# Altium PCB PCB_proj_module_1_1.PcbDoc (part 3 of 9)
Units mm, origin at the board's own origin, x right, y up, seen from the top; angles counter-clockwise.
Board outline 413 x 280 mm, 4 copper layers (Top Layer, Signal Layer 1, Signal Layer 2, Bottom Layer), stack 0.778 mm thick; 1054 components, 639 nets, 3181 pads, 673 vias.
Unrouted connection lines stored in the file: 570.
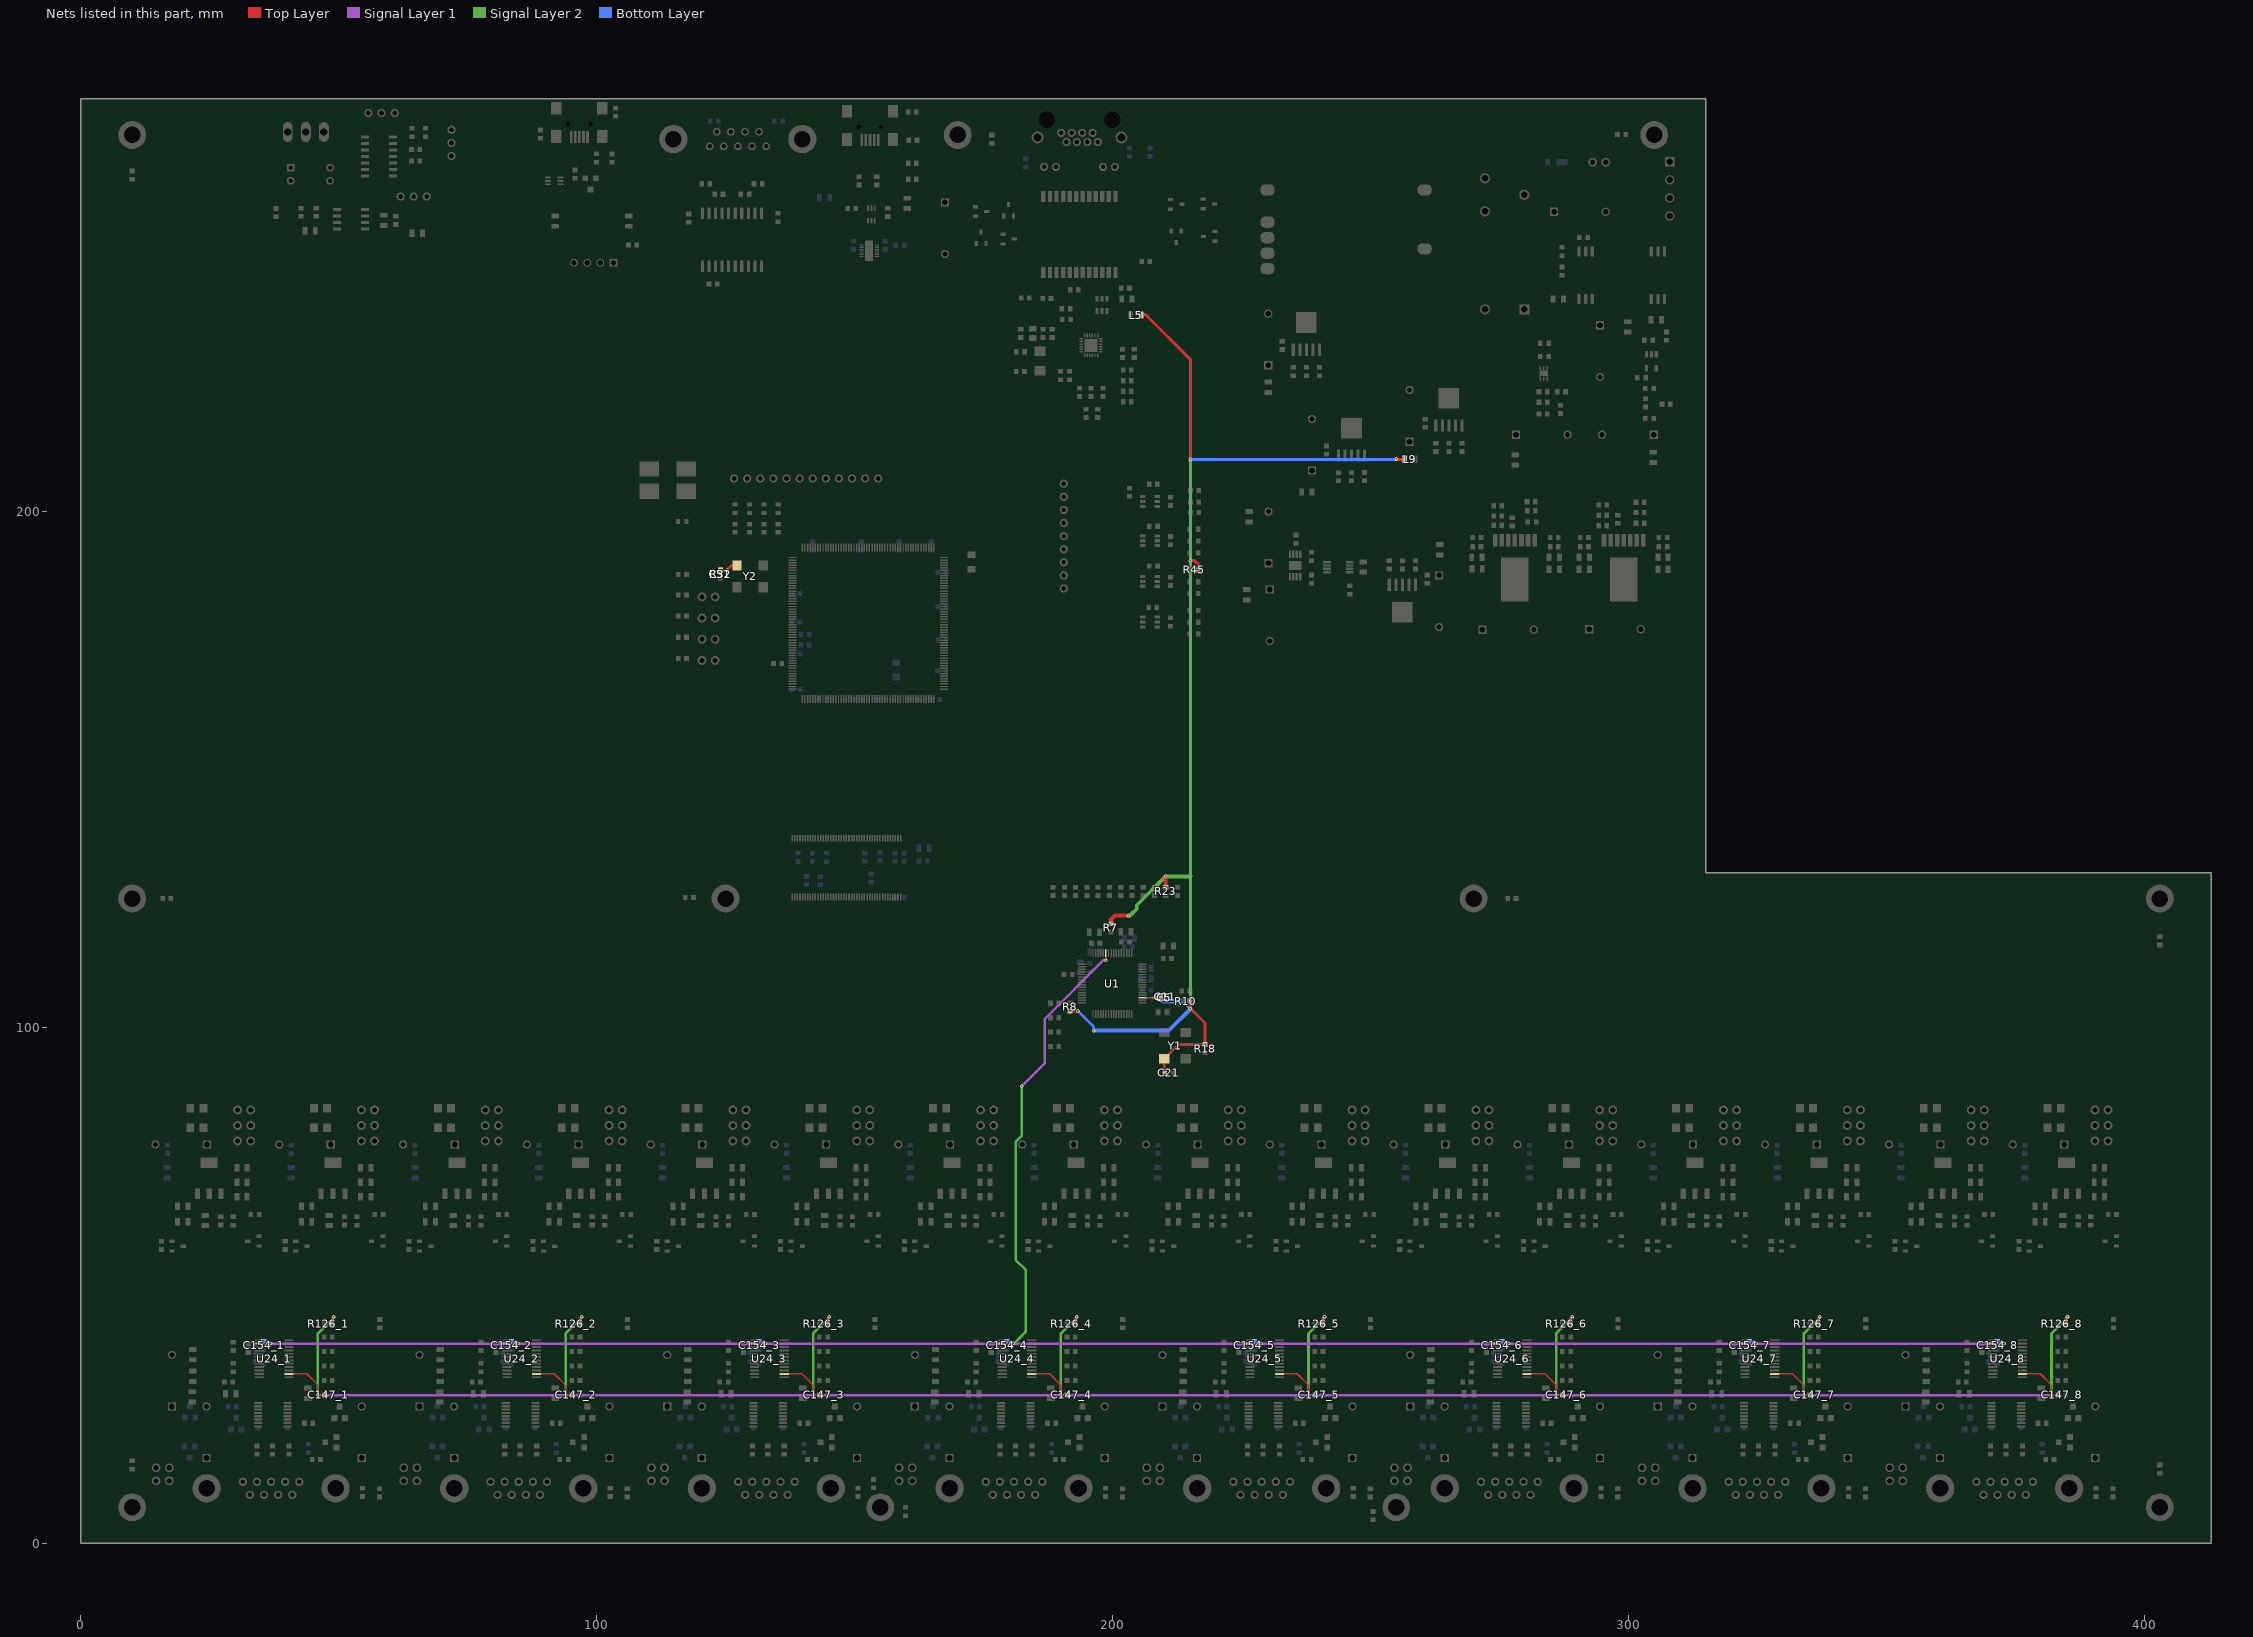
[diagram p5: the nets of this part, all layers, seen from the top]

## Components (designator, comment, footprint, x,y, rotation, side; value= is the part's Value field where it differs from the comment) (continued)
TP13_5 "VHall" TP2 216.4,16.55 r90 top (schematic designator TP13)
TP13_6 "VHall" TP2 264.4,16.55 r90 top (schematic designator TP13)
TP13_7 "VHall" TP2 312.4,16.55 r90 top (schematic designator TP13)
TP13_8 "VHall" TP2 360.4,16.55 r90 top (schematic designator TP13)
TP14_1 "AMPin" TP2 17.7,26.55 r90 top (schematic designator TP14)
TP14_2 "AMPin" TP2 65.7,26.55 r90 top (schematic designator TP14)
TP14_3 "AMPin" TP2 113.7,26.55 r90 top (schematic designator TP14)
TP14_4 "AMPin" TP2 161.7,26.55 r90 top (schematic designator TP14)
TP14_5 "AMPin" TP2 209.7,26.55 r90 top (schematic designator TP14)
TP14_6 "AMPin" TP2 257.7,26.55 r90 top (schematic designator TP14)
TP14_7 "AMPin" TP2 305.7,26.55 r90 top (schematic designator TP14)
TP14_8 "AMPin" TP2 353.7,26.55 r90 top (schematic designator TP14)
TP16 "5V8 source" TP2 271.7,177.1 r0 top value=OSC_TP
TP17 "3V source" TP2 292.4,177.2 r0 top value=OSC_TP
U1 "AD7768BSTZ" ST-64-2_ADI-M 199.978,108.524 r0 top locked
U2 "74HC02D" SOIC127P600X175-14N 57.805,268.824 r0 top
U3 "ADUM5028" SOIC127P600X175-8N 52.4,256.671 r180 top
U4 "STM32F756BGT6" QFP50P3000X3000X160-208N 152.65,178.35 r0 top
U5 "TPS3808ADJ" SOT95P270X145-6N 207.3,201.97 r0 top value=ADJ
U6 "TPS3808ADJ" SOT95P270X145-6N 207.3,194.35 r0 top value=ADJ
U7 "TPS3808ADJ" SOT95P270X145-6N 207.3,186.476 r0 top value=ADJ
U8 "TPS3808ADJ" SOT95P270X145-6N 207.3,178.602 r0 top value=ADJ
U9 "USBLC6-4SC6" SOT23-6L 197.96,240.073 r90 top
U10 "LAN8742A-CZ-TR" QFN24_0R5_4X4 195.869,232.224 r0 top
U11 "Switching Voltage Regulators 3A Pwr ModLMZ12003EXTTZ (TO-PMOD-7)" "NATIONAL_TO-PMOD-7 (TZA07A)" 278.004,189.114 r270 top value="800 mV to 6 V"
U12 "dc-dc 12V-12V DCP021212U" SOIC127P1030X265-28N 298.715,245.805 r90 top value=12V-12V
U13 "Positive LDO Linear stabilizer 5Vin to 3V3DigitalREG104GA-3.3 (SOT223-6)" SOT223_6-127 237.593,234.364 r0 top value=3V3
U14 "Positive LDO Linear stabilizer 5Vin to 3V3DigitalREG104GA-3.3 (SOT223-6)" SOT223_6-127 265.207,219.664 r0 top value=3V3
U15 "Switching Voltage Regulators 3A Pwr ModLMZ12003EXTTZ (TO-PMOD-7)" "NATIONAL_TO-PMOD-7 (TZA07A)" 299.082,189.114 r270 top value="800 mV to 6 V"
U16 "Positive LDO Linear stabilizer 5Vin to 3V3DigitalREG104GA-3.3 (SOT223-6)" SOT223_6-127 246.329,213.86 r0 top value=3V3
U17 "No Description AvailableADP7118ACPZN-R7 (Package)" CP-6-3_ADI-M 283.593,226.801 r90 top
U18 "0.25ppm Noise, Low Drift Precision ReferencesLTC6655LNCHMS8-4.096#TRPBF (MSOP-8 Analog Devices)" SOP65P490X110-8N 243.775,189.225 r180 top
U19 "Negative LDO Linear stabilizerADP7182AUJZ-R7 (Package)" SOT23-5 304.45,229.172 r270 top value=ADJ
U20 "Positive LDO Linear stabilizer 5Vin to 3V3DigitalREG104GA-5 (SOT223-6)" SOT223_6-127 256.196,182.806 r180 top value=3V3
U21 "IS42S32400F-6TL" SOP50P1176X120-86N 148.434,130.978 r270 top
U22_1 "Reference, 5 VLT3092EST (SOT-223)" SOT223 24.93,70.77 r90 top (schematic designator U22)
U22_2 "Reference, 5 VLT3092EST (SOT-223)" SOT223 48.93,70.77 r90 top (schematic designator U22)
U22_3 "Reference, 5 VLT3092EST (SOT-223)" SOT223 72.93,70.77 r90 top (schematic designator U22)
U22_4 "Reference, 5 VLT3092EST (SOT-223)" SOT223 96.93,70.77 r90 top (schematic designator U22)
U22_5 "Reference, 5 VLT3092EST (SOT-223)" SOT223 120.93,70.77 r90 top (schematic designator U22)
U22_6 "Reference, 5 VLT3092EST (SOT-223)" SOT223 144.93,70.77 r90 top (schematic designator U22)
U22_7 "Reference, 5 VLT3092EST (SOT-223)" SOT223 168.93,70.77 r90 top (schematic designator U22)
U22_8 "Reference, 5 VLT3092EST (SOT-223)" SOT223 192.93,70.77 r90 top (schematic designator U22)
U22_9 "Reference, 5 VLT3092EST (SOT-223)" SOT223 216.93,70.77 r90 top (schematic designator U22)
U22_10 "Reference, 5 VLT3092EST (SOT-223)" SOT223 240.93,70.77 r90 top (schematic designator U22)
U22_11 "Reference, 5 VLT3092EST (SOT-223)" SOT223 264.93,70.77 r90 top (schematic designator U22)
U22_12 "Reference, 5 VLT3092EST (SOT-223)" SOT223 288.93,70.77 r90 top (schematic designator U22)
U22_13 "Reference, 5 VLT3092EST (SOT-223)" SOT223 312.93,70.77 r90 top (schematic designator U22)
U22_14 "Reference, 5 VLT3092EST (SOT-223)" SOT223 336.93,70.77 r90 top (schematic designator U22)
U22_15 "Reference, 5 VLT3092EST (SOT-223)" SOT223 360.93,70.77 r90 top (schematic designator U22)
U22_16 "Reference, 5 VLT3092EST (SOT-223)" SOT223 384.93,70.77 r90 top (schematic designator U22)
U23_1 "ADG1609BRUZ" SOP65P640X120-16N 37.27,24.975 r180 top (schematic designator U23)
U23_2 "ADG1609BRUZ" SOP65P640X120-16N 85.27,24.975 r180 top (schematic designator U23)
U23_3 "ADG1609BRUZ" SOP65P640X120-16N 133.27,24.975 r180 top (schematic designator U23)
U23_4 "ADG1609BRUZ" SOP65P640X120-16N 181.27,24.975 r180 top (schematic designator U23)
U23_5 "ADG1609BRUZ" SOP65P640X120-16N 229.27,24.975 r180 top (schematic designator U23)
U23_6 "ADG1609BRUZ" SOP65P640X120-16N 277.27,24.975 r180 top (schematic designator U23)
U23_7 "ADG1609BRUZ" SOP65P640X120-16N 325.27,24.975 r180 top (schematic designator U23)
U23_8 "ADG1609BRUZ" SOP65P640X120-16N 373.27,24.975 r180 top (schematic designator U23)
U24_1 "ADA4254ARUZ" TSSOP-24 37.5,35.8 r0 top (schematic designator U24)
U24_2 "ADA4254ARUZ" TSSOP-24 85.5,35.8 r0 top (schematic designator U24)
U24_3 "ADA4254ARUZ" TSSOP-24 133.5,35.8 r0 top (schematic designator U24)
U24_4 "ADA4254ARUZ" TSSOP-24 181.5,35.8 r0 top (schematic designator U24)
U24_5 "ADA4254ARUZ" TSSOP-24 229.5,35.8 r0 top (schematic designator U24)
U24_6 "ADA4254ARUZ" TSSOP-24 277.5,35.8 r0 top (schematic designator U24)
U24_7 "ADA4254ARUZ" TSSOP-24 325.5,35.8 r0 top (schematic designator U24)
U24_8 "ADA4254ARUZ" TSSOP-24 373.5,35.8 r0 top (schematic designator U24)
U25 "USBUF02W6" SOTT323-6L_STM-M 153.273,257.592 r90 top
U26 "MURATA_MYBSP0122BABFT" "MURATA_MYBSP0122BABFT_0 - DUPLICATE" 246.319,255.914 r0 top
X2 "X53T-C20SSA-25.000MHz" XTAL_2SM_5R0X3R2 185.959,229.202 r90 top
Y1 "CB3LV-6C-8M000000" OSC_CB3LV-6C-8M000000 212.133,96.486 r180 top
Y2 "CB3LV-6C-8M000000" OSC_CB3LV-6C-8M000000 129.775,187.45 r90 top
С1 "100nF SMD0603" 0603C 122.817,275.73 r0 bottom value=100nF

## Footprints (in the part's own frame and the unit in brackets; to place one, negate y for a bottom-side part, rotate by r counter-clockwise, add the part's x,y. Pads: shape width x height; smd on the part's side, far side on the other; paste and mask are expansions set on the pad)
15EDGRC-3.5-3P-PAK [mm]
  oval 3.861x1.93 hole 1.4: 1(3.4,3.5) 2(3.4,0) 3(3.4,-3.5)
  silkscreen extent -4.6,-5.65 4.6,5.65, body extent -4.6,-5.65 4.6,5.65, height 7.24
0603C [mm] "Chip Capacitor, Body 1.6x0.8mm, Height 1.0mm, IPC Medium Density"
  rect 0.9x1 smd: 1(-0.8,0) 2(0.8,0)
  silkscreen extent -1.5,-0.7 1.5,0.7, body extent -0.87,-0.48 0.88,0.47, height 1
0603R [mm]
  rect 0.9x1 smd: 1(-0.8,0) 2(0.8,0)
  silkscreen extent -1.5,-0.8 1.5,0.8, body extent -0.85,-0.47 0.85,0.47, height 0.6
0805C [mm] "Chip Capacitor, Body 2.0x1.25mm, IPC Medium Density"
  rect 1.1x1.45 smd: 1(-0.9,0) 2(0.9,0)
  body extent -1.05,-0.67 1.05,0.68, height 0.9
AMPHENOL_L717DFE09P1ATN [mm] "Right Angled D-Sub 9 Male Contacts with Metal Bracket and Front Female Screwlock (UNC4-40)"
  round 1.6 hole 0.9: 1(5.48,-1.27) 2(2.74,-1.27) 3(0,-1.27) 4(-2.74,-1.27) 5(-5.48,-1.27) 6(4.11,1.27) 7(1.37,1.27) 8(-1.37,1.27) 9(-4.11,1.27)
  round 5.5 hole 3.2: 10(-12.495,0) 11(12.495,0)
  silkscreen extent -15.6,-2.93 15.6,17.67, body extent -15.6,-2.93 15.6,17.67, height 13.45
AMPHENOL_RJHSE-5381 [mm] "1 Port, 8 Positions, CAT5 RJ45 Modular Connector With Yellow And Green LEDs"
  round 1.6 hole 0.9: 1(-3.554,0.886) 2(-2.538,-0.894) 3(-1.522,0.886) 4(-0.506,-0.894) 5(0.51,0.886) 6(1.526,-0.894) 7(2.542,0.886) 8(3.558,-0.894) 9(-6.862,-5.714) 10(-4.572,-5.714) 11(4.568,-5.714) 12(6.858,-5.714)
  round 1 hole 3.2 unplated mask+1.1: M1(-6.352,3.426) M2(6.348,3.426)
  round 2.3 hole 1.6: SHIELD(-8.132,-0.004) SHIELD(8.128,-0.004)
  silkscreen extent -8.26,-7.04 8.25,9.17, body extent -8.42,-7.04 8.41,9.17, height 15.14
COMATEL_385.0358.1.03.400 [mm] "3 Contacts Straight Strip Header Pitch 2.54mm L=6.3mm ''Mini-Wire-Wrap''"
  round 1.6 hole 0.9: 1(0,0) 2(2.54,0) 3(5.08,0)
  silkscreen extent -1.27,-1.23 6.35,1.93, body extent -1.27,-1.22 6.35,1.23, height 8
CP-6-3_ADI-M [mil]
  rect 33x12 smd paste+0 mask+0: 1(-41,25.59) 2(-41,0) 3(-41,-25.59) 4(41,-25.59) 5(41,0) 6(41,25.59)
  rect 39x63 smd paste+0 mask+0: 7(0,0)
  silkscreen extent -89,-46 46,46, body extent -41,-41 42,42, height 24
DFLS [mil]
  rect 83x49 smd paste+0 mask+0: 1(-43.5,0)
  rect 39x49 smd paste+0 mask+0: 2(65.5,0)
  silkscreen extent -114,-43 64,43, body extent -77,-38 77,38, height 32
DFN_12-045 [mm] "0.45mm pitch 12pin"
  rect 0.8x0.25 smd: 1(-1.5,1.15) 2(-1.5,0.7) 3(-1.5,0.25) 4(-1.5,-0.2) 5(-1.5,-0.65) 6(-1.5,-1.1) 7(1.5,-1.1) 8(1.5,-0.65) 9(1.5,-0.2) 10(1.5,0.25) 11(1.5,0.7) 12(1.5,1.15)
  rect 1.6x4 smd: 13(0,0)
  silkscreen extent -2,-2.25 2.05,2.25, body extent -1.5,-1.48 1.5,1.53, height 0.75
DIP4-300 [mm] "DIP 4 Leads, Row Spacing 7.62 mm; Pitch 2.54 mm"
  rect 1.5x1.5 hole 0.9: 1(-3.81,1.27)
  round 1.5 hole 0.9: 2(-3.81,-1.27) 3(3.81,-1.27) 4(3.81,1.27)
  silkscreen extent -2.65,-2.61 2.65,2.61, body extent -3.93,-2.54 3.94,2.54, height 5.33
HDR_1X4_2R54_V_M [mm] "Male Header, Pitch 2.54mm, 4x1 Position, Mated Height 6mm, Tail Length 3mm"
  rect 1.5x1.5 hole 1.02: 1(0,0)
  round 1.5 hole 1.02: 2(2.54,0) 3(5.08,0) 4(7.62,0)
  silkscreen extent -1.27,-1.27 8.89,1.76, body extent -1.27,-1.27 8.89,1.27, height 9
LED0603 [mm]
  rect 0.8x1 smd: 1(-0.825,0) 2(0.825,0)
  silkscreen extent -1.65,-0.7 1.4,0.7, body extent -0.71,-0.47 0.81,0.48, height 0.95
M3 [mm]
  round 5.4 hole 3.2: 1(0,0)
"MURATA_MYBSP0122BABFT_0 - DUPLICATE" [mm]
  rrect91% 2.8x2.2 smd: 1(-16.27,6.42) 2(-16.27,0.18) 3(-16.27,-2.82) 4(-16.27,-5.82) 5(-16.27,-8.82) 6(14.17,-5.01) 7(14.17,6.42)
  silkscreen extent -19.75,-12.65 16.95,10.25, body extent -18.77,-12.34 16.73,10.06, height 11.15
"NATIONAL_TO-PMOD-7 (TZA07A)" [mm] "TO-PMOD 7 Pin Package, NATIONAL Package TZA07A, 1.70mm pitch; 9.85mm L X 10.16mm W X 4.67mm H body"
  rect 2.41x0.89 smd: 1(-5.339,3.81) 2(-5.339,2.54) 3(-5.339,1.27) 4(-5.339,0) 5(-5.339,-1.27) 6(-5.339,-2.54) 7(-5.339,-3.81)
  rect 8.54x5.35 smd: 8(2.291,0)
  silkscreen extent -3.73,-5.08 7.57,5.08, body extent -6.2,-5.08 7.57,5.08, height 4.77
OSC_CB3LV-6C-8M000000 [mm]
  rect 2x1.8 smd: 1(-2.1,2.54) 2(-2.1,-2.54) 3(2.1,-2.54) 4(2.1,2.54)
  silkscreen extent -3.95,-3.5 2.5,3.5, body extent -2.5,-3.5 2.5,3.5, height 1.8
"PB-6X6MM-BLACK - DUPLICATE" [mm] "Surface Mounting Type Tact Switch, 4-Leads, Body 6x6mm, Height 4.5mm Black"
  rect 3.8x3 smd: 1(-3.575,2.15) 2(-3.575,-2.15) 3(3.575,-2.15) 4(3.575,2.15)
  silkscreen extent -5.8,-3.95 5.8,3.95, body extent -3,-3 3,3, height 10.5
QFN24_0R5_4X4 [mm] "SQFN 24 Pins, Pitch 0.5mm, 4mmx4mm"
  rect 0.69x0.28 smd: 1(-1.9,1.25) 2(-1.9,0.75) 3(-1.9,0.25) 4(-1.9,-0.25) 5(-1.9,-0.75) 6(-1.9,-1.25) 13(1.9,-1.25) 14(1.9,-0.75) 15(1.9,-0.25) 16(1.9,0.25) 17(1.9,0.75) 18(1.9,1.25)
  rect 0.28x0.69 smd: 7(-1.25,-1.9) 8(-0.75,-1.9) 9(-0.25,-1.9) 10(0.25,-1.9) 11(0.75,-1.9) 12(1.25,-1.9) 19(1.25,1.9) 20(0.75,1.9) 21(0.25,1.9) 22(-0.25,1.9) 23(-0.75,1.9) 24(-1.25,1.9)
  rect 2.5x2.5 smd: 25(0,0)
  silkscreen extent -2.46,-2.05 2.05,2.05, body extent -2.05,-2.05 2.05,2.05, height 1
QFP50P3000X3000X160-208N [mm]
  rrect25% 1.52x0.28 smd: 1(-14.675,12.75) 2(-14.675,12.25) 3(-14.675,11.75) 4(-14.675,11.25) 5(-14.675,10.75) 6(-14.675,10.25) 7(-14.675,9.75) 8(-14.675,9.25) 9(-14.675,8.75) 10(-14.675,8.25) 11(-14.675,7.75) 12(-14.675,7.25) 13(-14.675,6.75) 14(-14.675,6.25) 15(-14.675,5.75) 16(-14.675,5.25) 17(-14.675,4.75) 18(-14.675,4.25) 19(-14.675,3.75) 20(-14.675,3.25) 21(-14.675,2.75) 22(-14.675,2.25) 23(-14.675,1.75) 24(-14.675,1.25) 25(-14.675,0.75) 26(-14.675,0.25) 27(-14.675,-0.25) 28(-14.675,-0.75) 29(-14.675,-1.25) 30(-14.675,-1.75) 31(-14.675,-2.25) 32(-14.675,-2.75) 33(-14.675,-3.25) 34(-14.675,-3.75) 35(-14.675,-4.25) 36(-14.675,-4.75) 37(-14.675,-5.25) 38(-14.675,-5.75) 39(-14.675,-6.25) 40(-14.675,-6.75) 41(-14.675,-7.25) 42(-14.675,-7.75) 43(-14.675,-8.25) 44(-14.675,-8.75) 45(-14.675,-9.25) 46(-14.675,-9.75) 47(-14.675,-10.25) 48(-14.675,-10.75) 49(-14.675,-11.25) 50(-14.675,-11.75) 51(-14.675,-12.25) 52(-14.675,-12.75) 105(14.675,-12.75) 106(14.675,-12.25) 107(14.675,-11.75) 108(14.675,-11.25) 109(14.675,-10.75) 110(14.675,-10.25) 111(14.675,-9.75) 112(14.675,-9.25) 113(14.675,-8.75) 114(14.675,-8.25) 115(14.675,-7.75) 116(14.675,-7.25) 117(14.675,-6.75) 118(14.675,-6.25) 119(14.675,-5.75) 120(14.675,-5.25) 121(14.675,-4.75) 122(14.675,-4.25) 123(14.675,-3.75) 124(14.675,-3.25) 125(14.675,-2.75) 126(14.675,-2.25) 127(14.675,-1.75) 128(14.675,-1.25) 129(14.675,-0.75) 130(14.675,-0.25) 131(14.675,0.25) 132(14.675,0.75) 133(14.675,1.25) 134(14.675,1.75) 135(14.675,2.25) 136(14.675,2.75) 137(14.675,3.25) 138(14.675,3.75) 139(14.675,4.25) 140(14.675,4.75) 141(14.675,5.25) 142(14.675,5.75) 143(14.675,6.25) 144(14.675,6.75) 145(14.675,7.25) 146(14.675,7.75) 147(14.675,8.25) 148(14.675,8.75) 149(14.675,9.25) 150(14.675,9.75) 151(14.675,10.25) 152(14.675,10.75) 153(14.675,11.25) 154(14.675,11.75) 155(14.675,12.25) 156(14.675,12.75)
  rrect25% 0.28x1.52 smd: 53(-12.75,-14.675) 54(-12.25,-14.675) 55(-11.75,-14.675) 56(-11.25,-14.675) 57(-10.75,-14.675) 58(-10.25,-14.675) 59(-9.75,-14.675) 60(-9.25,-14.675) 61(-8.75,-14.675) 62(-8.25,-14.675) 63(-7.75,-14.675) 64(-7.25,-14.675) 65(-6.75,-14.675) 66(-6.25,-14.675) 67(-5.75,-14.675) 68(-5.25,-14.675) 69(-4.75,-14.675) 70(-4.25,-14.675) 71(-3.75,-14.675) 72(-3.25,-14.675) 73(-2.75,-14.675) 74(-2.25,-14.675) 75(-1.75,-14.675) 76(-1.25,-14.675) 77(-0.75,-14.675) 78(-0.25,-14.675) 79(0.25,-14.675) 80(0.75,-14.675) 81(1.25,-14.675) 82(1.75,-14.675) 83(2.25,-14.675) 84(2.75,-14.675) 85(3.25,-14.675) 86(3.75,-14.675) 87(4.25,-14.675) 88(4.75,-14.675) 89(5.25,-14.675) 90(5.75,-14.675) 91(6.25,-14.675) 92(6.75,-14.675) 93(7.25,-14.675) 94(7.75,-14.675) 95(8.25,-14.675) 96(8.75,-14.675) 97(9.25,-14.675) 98(9.75,-14.675) 99(10.25,-14.675) 100(10.75,-14.675) 101(11.25,-14.675) 102(11.75,-14.675) 103(12.25,-14.675) 104(12.75,-14.675) 157(12.75,14.675) 158(12.25,14.675) 159(11.75,14.675) 160(11.25,14.675) 161(10.75,14.675) 162(10.25,14.675) 163(9.75,14.675) 164(9.25,14.675) 165(8.75,14.675) 166(8.25,14.675) 167(7.75,14.675) 168(7.25,14.675) 169(6.75,14.675) 170(6.25,14.675) 171(5.75,14.675) 172(5.25,14.675) 173(4.75,14.675) 174(4.25,14.675) 175(3.75,14.675) 176(3.25,14.675) 177(2.75,14.675) 178(2.25,14.675) 179(1.75,14.675) 180(1.25,14.675) 181(0.75,14.675) 182(0.25,14.675) 183(-0.25,14.675) 184(-0.75,14.675) 185(-1.25,14.675) 186(-1.75,14.675) 187(-2.25,14.675) 188(-2.75,14.675) 189(-3.25,14.675) 190(-3.75,14.675) 191(-4.25,14.675) 192(-4.75,14.675) 193(-5.25,14.675) 194(-5.75,14.675) 195(-6.25,14.675) 196(-6.75,14.675) 197(-7.25,14.675) 198(-7.75,14.675) 199(-8.25,14.675) 200(-8.75,14.675) 201(-9.25,14.675) 202(-9.75,14.675) 203(-10.25,14.675) 204(-10.75,14.675) 205(-11.25,14.675) 206(-11.75,14.675) 207(-12.25,14.675) 208(-12.75,14.675)
  silkscreen extent -16.49,-14 14,14, body extent -15,-15 15,15, height 1.6
RC1206_0805 [mil]
  rect 60x63 smd paste+0 mask+0: 1(-50,0) 2(50,0)
  silkscreen extent -87,-39 87,39, body extent -63,-31 63,32, height 28
RELAY_G6RN-1_12DC [mm]
  rect 1.95x1.95 hole 1.3: 1(0,0)
  round 1.95 hole 1.3: 2(22.2,0) 3(25.4,7.62) 4(19,7.62) 5(0,7.62)
  silkscreen extent -1.6,-2.1 26.9,8.81, body extent -1.6,-1.19 26.9,8.81, height 15
RESC2012X50N [mm] "Chip Resistor, EIA 0805, Metric 2012, Body 2.0x1.25mm, IPC Medium Density"
  rect 0.95x1.45 smd: 1(-1,0) 2(1,0)
  silkscreen extent -1.8,-1 1.8,1, body extent -1.1,-0.67 1.1,0.68, height 0.5
SAMTEC_TSW-102-23-L-S [mm] "2 Contacts - Pitch 2.54mm - Single Row  Through Mount Straigh Header (Post Lead 5.84mm, Tail Lead 2.92mm, Insulator 2.54mm)"
  round 1.7 hole 1: 1(0,0) 2(2.54,0)
  silkscreen extent -2.15,-1.27 3.81,1.27, body extent -1.27,-1.27 3.81,1.27, height 8.38
SOIC127P600X175-8N [mm] "SOIC 8, Pitch 1.27mm - Body 4x5mm, IPC Medium Density"
  rect 1.55x0.6 smd: 1(-2.7,1.905) 2(-2.7,0.635) 3(-2.7,-0.635) 4(-2.7,-1.905) 5(2.7,-1.905) 6(2.7,-0.635) 7(2.7,0.635) 8(2.7,1.905)
  silkscreen extent -2.53,-2.5 1.55,2.88, body extent -3.1,-2.5 3.1,2.5, height 1.75
SOIC127P600X175-14N [mm] "SOIC 14, Pitch 1.27mm - Body 4x8.75mm, IPC Medium Density"
  rect 1.55x0.6 smd: 1(-2.7,3.81) 2(-2.7,2.54) 3(-2.7,1.27) 4(-2.7,0) 5(-2.7,-1.27) 6(-2.7,-2.54) 7(-2.7,-3.81) 8(2.7,-3.81) 9(2.7,-2.54) 10(2.7,-1.27) 11(2.7,0) 12(2.7,1.27) 13(2.7,2.54) 14(2.7,3.81)
  silkscreen extent -2.52,-4.4 1.55,4.78, body extent -3.1,-4.37 3.1,4.38, height 1.75
SOIC127P1030X265-28N [mm]
  rrect25% 1.9x0.6 smd: 1(-4.605,8.255) 2(-4.605,6.985) 3(-4.605,5.715) 12(-4.605,-5.715) 13(-4.605,-6.985) 14(-4.605,-8.255) 15(4.605,-8.255) 16(4.605,-6.985) 17(4.605,-5.715) 26(4.605,5.715) 27(4.605,6.985) 28(4.605,8.255)
  silkscreen extent -6.6,-8.95 3.75,8.95, body extent -5.17,-8.95 5.17,8.95, height 2.65
SOIC127P1032X265-20N [mm] "SOIC, 1.27mm pitch; 20 pin, 7.50mm W X 12.80mm L X 2.65mm H body, IPC Medium Density"
  rect 2.2x0.6 smd: 1(-5.15,5.715) 2(-5.15,4.445) 3(-5.15,3.175) 4(-5.15,1.905) 5(-5.15,0.635) 6(-5.15,-0.635) 7(-5.15,-1.905) 8(-5.15,-3.175) 9(-5.15,-4.445) 10(-5.15,-5.715) 11(5.15,-5.715) 12(5.15,-4.445) 13(5.15,-3.175) 14(5.15,-1.905) 15(5.15,-0.635) 16(5.15,0.635) 17(5.15,1.905) 18(5.15,3.175) 19(5.15,4.445) 20(5.15,5.715)
  silkscreen extent -5.52,-6.4 3.32,6.67, body extent -5.18,-6.5 5.18,6.5, height 1.68
SOIC127P1600X551-24N [mm]
  rect 2.15x0.85 smd: 1(-7.4,6.985) 2(-7.4,5.715) 3(-7.4,4.445) 4(-7.4,3.175) 5(-7.4,1.905) 6(-7.4,0.635) 7(-7.4,-0.635) 8(-7.4,-1.905) 9(-7.4,-3.175) 10(-7.4,-4.445) 11(-7.4,-5.715) 12(-7.4,-6.985) 13(7.4,-6.985) 14(7.4,-5.715) 15(7.4,-4.445) 16(7.4,-3.175) 17(7.4,-1.905) 18(7.4,-0.635) 19(7.4,0.635) 20(7.4,1.905) 21(7.4,3.175) 22(7.4,4.445) 23(7.4,5.715) 24(7.4,6.985)
  silkscreen extent -8.47,-8.76 5.97,8.76, body extent -8,-8.76 8,8.76, height 5.71
SOP50P1176X120-86N [mm] "SOP, 0.50mm, pitch; 86 pin, 10.16mm W X 22.22mm L X 1.20mm H body, IPC Medium Density"
  rect 1.3x0.3 smd: 1(-5.7,10.5) 2(-5.7,10) 3(-5.7,9.5) 4(-5.7,9) 5(-5.7,8.5) 6(-5.7,8) 7(-5.7,7.5) 8(-5.7,7) 9(-5.7,6.5) 10(-5.7,6) 11(-5.7,5.5) 12(-5.7,5) 13(-5.7,4.5) 14(-5.7,4) 15(-5.7,3.5) 16(-5.7,3) 17(-5.7,2.5) 18(-5.7,2) 19(-5.7,1.5) 20(-5.7,1) 21(-5.7,0.5) 22(-5.7,0) 23(-5.7,-0.5) 24(-5.7,-1) 25(-5.7,-1.5) 26(-5.7,-2) 27(-5.7,-2.5) 28(-5.7,-3) 29(-5.7,-3.5) 30(-5.7,-4) 31(-5.7,-4.5) 32(-5.7,-5) 33(-5.7,-5.5) 34(-5.7,-6) 35(-5.7,-6.5) 36(-5.7,-7) 37(-5.7,-7.5) 38(-5.7,-8) 39(-5.7,-8.5) 40(-5.7,-9) 41(-5.7,-9.5) 42(-5.7,-10) 43(-5.7,-10.5) 44(5.7,-10.5) 45(5.7,-10) 46(5.7,-9.5) 47(5.7,-9) 48(5.7,-8.5) 49(5.7,-8) 50(5.7,-7.5) 51(5.7,-7) 52(5.7,-6.5) 53(5.7,-6) 54(5.7,-5.5) 55(5.7,-5) 56(5.7,-4.5) 57(5.7,-4) 58(5.7,-3.5) 59(5.7,-3) 60(5.7,-2.5) 61(5.7,-2) 62(5.7,-1.5) 63(5.7,-1) 64(5.7,-0.5) 65(5.7,0) 66(5.7,0.5) 67(5.7,1) 68(5.7,1.5) 69(5.7,2) 70(5.7,2.5) 71(5.7,3) 72(5.7,3.5) 73(5.7,4) 74(5.7,4.5) 75(5.7,5) 76(5.7,5.5) 77(5.7,6) 78(5.7,6.5) 79(5.7,7) 80(5.7,7.5) 81(5.7,8) 82(5.7,8.5) 83(5.7,9) 84(5.7,9.5) 85(5.7,10) 86(5.7,10.5)
  silkscreen extent -6.22,-11.1 4.72,11.28, body extent -5.97,-11.15 5.97,11.15, height 1.2
SOP65P488X110-9N-R178X241 [mm] "SOP, 8-Leads, Body 3x3mm (max), Pitch 0.65mm, (w/thermal tab 2 .41 X 1.78 mm), IPC Medium Density"
  rect 1.45x0.45 smd: 1(-2.2,0.975) 2(-2.2,0.325) 3(-2.2,-0.325) 4(-2.2,-0.975) 5(2.2,-0.975) 6(2.2,-0.325) 7(2.2,0.325) 8(2.2,0.975)
  rect 1.75x2.4 smd: 9(0,0)
  silkscreen extent -2.77,-1.5 1.12,1.83, body extent -2.45,-1.55 2.45,1.55, height 1.1
SOP65P490X110-8N [mm] "SOP, 0.65mm pitch; 8 pin, 3.00mm W X 3.00mm L X 1.10mm H body, IPC Medium Density"
  rect 1.5x0.45 smd: 1(-2.2,0.975) 2(-2.2,0.325) 3(-2.2,-0.325) 4(-2.2,-0.975) 5(2.2,-0.975) 6(2.2,-0.325) 7(2.2,0.325) 8(2.2,0.975)
  silkscreen extent -2.83,-1.5 1.12,1.82, body extent -2.45,-1.55 2.45,1.55, height 1.1
SOP65P640X120-16N [mm]
  rrect25% 1.57x0.41 smd: 1(-2.87,2.275) 2(-2.87,1.625) 3(-2.87,0.975) 4(-2.87,0.325) 5(-2.87,-0.325) 6(-2.87,-0.975) 7(-2.87,-1.625) 8(-2.87,-2.275) 9(2.87,-2.275) 10(2.87,-1.625) 11(2.87,-0.975) 12(2.87,-0.325) 13(2.87,0.325) 14(2.87,0.975) 15(2.87,1.625) 16(2.87,2.275)
  silkscreen extent -4.29,-2.5 1.77,2.5, body extent -3.2,-2.5 3.2,2.5, height 1.2
SOT23-5 [mm] "SOT, 0.95mm Pitch; 5 Pin,1.55mm W X 2.90mm L X 1.45mm H body, IPC Medium Density"
  rect 1.25x0.6 smd: 1(-1.35,0.95) 2(-1.35,0) 3(-1.35,-0.95) 4(1.35,-0.95) 5(1.35,0.95)
  silkscreen extent -1.82,-1.45 0.4,1.88, body extent -1.35,-1.45 1.35,1.45, height 1.45
SOT23-6L [mm]
  rect 1.1x0.6 smd: 1(-1.2,0.95) 2(-1.2,0) 3(-1.2,-0.95) 4(1.2,-0.95) 5(1.2,0) 6(1.2,0.95)
  silkscreen extent -1.32,-1.5 0.25,1.92, body extent -0.86,-1.51 0.87,1.52, height 1.25
SOT95P229X119-3N [mm]
  rect 1x0.65 smd: 1(-1.1,0.95) 2(-1.1,-0.95) 3(1.1,0)
  silkscreen extent -1.47,-1.45 0.28,1.92, body extent -1.25,-1.5 1.25,1.5, height 1.19
SOT95P270X145-6N [mm] "SOT, 0.95mm Pitch; 6 Pin,1.55mm W X 2.90mm L X 1.45mm H body, IPC Medium Density"
  rect 1.1x0.6 smd: 1(-1.4,0.95) 2(-1.4,0) 3(-1.4,-0.95) 4(1.4,-0.95) 5(1.4,0) 6(1.4,0.95)
  silkscreen extent -1.82,-1.45 0.45,1.87, body extent -1.35,-1.45 1.35,1.45, height 1.45
SOT223 [mm] "SOT223, 2.30mm pitch; 3 pin, 3.70mm W X 6.70mm L, IPC Medium Density"
  rect 2x1 smd: 1(-3,2.3) 2(-3,0) 3(-3,-2.3)
  rect 2x3.3 smd: 4(3,0)
  silkscreen extent -3.87,-3.25 1.68,3.42, body extent -3.65,-3.35 3.65,3.35, height 1.75
SOT223_6-127 [mil]
  rect 24x93 smd paste+0 mask+0: 1(-100,-118.5) 2(-50,-118.5) 3(0,-118.5) 4(50,-118.5) 5(100,-118.5)
  rect 157.48x157.48 smd: 6(0,90)
  silkscreen extent -134,-103 134,75, body extent -129,-143 129,143, height 71
SOT-23 [mil]
  rect 44x44 smd: 1(0,0) 2(80,0) 3(40,87)
  silkscreen extent -19,38 94,70, body extent -22,-4 96,94, height 43
SOTT323-6L_STM-M [mil]
  rect 42.5x14 smd paste+0 mask+0: 1(-47.75,25.59) 2(-47.75,0) 3(-47.75,-25.59) 4(47.75,-25.59) 5(47.75,0) 6(47.75,25.59)
  silkscreen extent -61,-48 32,57, body extent -47,-44 47,44, height 43
ST-64-2_ADI-M [mil]
  rect 61x11 smd paste+0 mask+0: 1(-231.5,147.64) 2(-231.5,127.95) 3(-231.5,108.27) 4(-231.5,88.58) 5(-231.5,68.9) 6(-231.5,49.21) 7(-231.5,29.53) 8(-231.5,9.84) 9(-231.5,-9.84) 10(-231.5,-29.53) 11(-231.5,-49.21) 12(-231.5,-68.9) 13(-231.5,-88.58) 14(-231.5,-108.27) 15(-231.5,-127.95) 16(-231.5,-147.64) 33(231.5,-147.64) 34(231.5,-127.95) 35(231.5,-108.27) 36(231.5,-88.58) 37(231.5,-68.9) 38(231.5,-49.21) 39(231.5,-29.53) 40(231.5,-9.84) 41(231.5,9.84) 42(231.5,29.53) 43(231.5,49.21) 44(231.5,68.9) 45(231.5,88.58) 46(231.5,108.27) 47(231.5,127.95) 48(231.5,147.64)
  rect 11x61 smd paste+0 mask+0: 17(-147.64,-231.5) 18(-127.95,-231.5) 19(-108.27,-231.5) 20(-88.58,-231.5) 21(-68.9,-231.5) 22(-49.21,-231.5) 23(-29.53,-231.5) 24(-9.84,-231.5) 25(9.84,-231.5) 26(29.53,-231.5) 27(49.21,-231.5) 28(68.9,-231.5) 29(88.58,-231.5) 30(108.27,-231.5) 31(127.95,-231.5) 32(147.64,-231.5) 49(147.64,231.5) 50(127.95,231.5) 51(108.27,231.5) 52(88.58,231.5) 53(68.9,231.5) 54(49.21,231.5) 55(29.53,231.5) 56(9.84,231.5) 57(-9.84,231.5) 58(-29.53,231.5) 59(-49.21,231.5) 60(-68.9,231.5) 61(-88.58,231.5) 62(-108.27,231.5) 63(-127.95,231.5) 64(-147.64,231.5)
  silkscreen extent -282,-282 282,282, body extent -240,-240 240,240, height 63
TAN-A [mil] "TAN Capacitor"
  rect 50x60 smd: 1(55,0) 2(-55,0)
  silkscreen extent -95,-45 130,45, body extent -47,-35 47,35, height 39
TE_284512-4 [mm]
  rect 1.8x1.8 / inner round 1.8 / far side rect 1.8x1.8 hole 1.2: 1(-5.25,0)
  round 1.8 hole 1.2: 2(-1.75,0) 3(1.75,0) 4(5.25,0)
  silkscreen extent -8.6,-1.2 7.5,8, body extent -8,-1.2 8,8, height 7.25
TP2 [mm]
  rect 1.6x1.6 hole 1.1: 1(0,0)
  round 1.6 hole 1: 2(10,0)
  silkscreen extent -1.2,-1.27 11.2,1.27
TSSOP-24 [mil]
  rect 70x14 smd paste+0 mask+0: 1(-113,140.75) 2(-113,115.16) 3(-113,89.57) 4(-113,63.98) 5(-113,38.39) 6(-113,12.8) 7(-113,-12.8) 8(-113,-38.39) 9(-113,-63.98) 10(-113,-89.57) 11(-113,-115.16) 12(-113,-140.75) 13(113,-140.75) 14(113,-115.16) 15(113,-89.57) 16(113,-63.98) 17(113,-38.39) 18(113,-12.8) 19(113,12.8) 20(113,38.39) 21(113,63.98) 22(113,89.57) 23(113,115.16) 24(113,140.75)
  silkscreen extent -168,-160 168,190, body extent -126,-156 126,156, height 47
TYCO_1734035-1 [mm] "SMD, Right Angle, 5 Position, Type B, Mini USB Receptacle"
  rect 0.5x2.3 smd: 1(-1.575,0) 2(-0.8,0) 3(0,0) 4(0.8,0) 5(1.6,0)
  rect 2x2.5 smd: 6(-4.45,-0.1) 6(-4.45,-5.6) 6(4.45,-0.1) 6(4.45,-5.6)
  round 0.5 hole 0.9 unplated mask+0.2: MTG1(-2.2,-2.6) MTG2(2.2,-2.6)
  silkscreen extent -4.35,-8.5 4.35,0.7, body extent -4.95,-8.5 4.95,0.7, height 4.14
TYCO_5747844-5 [mm] "Right Angle 9 Female Contacts D-SUB Connector With PCB Mount Retention , Grounding Straps, and Fixed UNC 4-40 Female Screwlocks"
  round 1.5 hole 0.9: 1(-5.48,-1.422) 2(-2.74,-1.422) 3(0,-1.422) 4(2.74,-1.422) 5(5.48,-1.422) 6(-4.11,1.422) 7(-1.37,1.422) 8(1.37,1.422) 9(4.11,1.422)
  round 5.5 hole 3.2: 10(-12.495,0) 11(12.495,0)
  silkscreen extent -15.49,-3.19 15.49,15.6, body extent -15.49,-3.18 15.49,15.71, height 12.55
XTAL_2SM_5R0X3R2 [mm] "CRYSTAL 25M Hz  30F SMD 2 pads"
  rect 1.8x2.2 smd: 1(-1.9,0) 2(1.9,0)
  silkscreen extent -0.4,-1.27 0.4,1.27, body extent -2.5,-1.6 2.5,1.6, height 1.3

## Part data
B1: library part "SW PUSHBUTTON", "SE PUSHBUTTON", PartNumber=KAN0341-0151C1-14, TypeMount=SMD
C1 C2 C3 C4 C5 C6 C17 C18 C19 C20 C21 C22 C24 C25 C26 C27 C28 C29 C30 C31 C32 C33 C34 C35 C36 C37 C38 C39 C40 C41 C42 C43 C44 C45 C48 C49 C50 C51 C52 C53 C54 C55 C56 C57 C58 C59 C60 C61 C62 C63 C64 C65 C66 C67 C68 C69 C70 C71 C72 C73 C74 C75 C76 C77 C79 C80 C81 C82 C83 C84 C87 C88 C89 C90 C93 C95 C97 C98 C100 C104 C105 C106 C107 C108 C109 C112 C113 C116 C117 C118 C119 C120 C121 C122 C123 C124 C125 C126 C127 C128 C129 C130 C131 C132 C133 C134 C135 C136 C137 C138 C139 C140 C141 C142 C143 C144 C145 C146 C147_1 C147_2 C147_3 C147_4 C147_5 C147_6 C147_7 C147_8 C150_1 C150_2 C150_3 C150_4 C150_5 C150_6 C150_7 C150_8 C151_1 C151_2 C151_3 C151_4 C151_5 C151_6 C151_7 C151_8 C152_1 C152_2 C152_3 C152_4 C152_5 C152_6 C152_7 C152_8 C153_1 C153_2 C153_3 C153_4 C153_5 C153_6 C153_7 C153_8 C154_1 C154_2 C154_3 C154_4 C154_5 C154_6 C154_7 C154_8 C155_1 C155_2 C155_3 C155_4 C155_5 C155_6 C155_7 C155_8 C156_1 C156_2 C156_3 C156_4 C156_5 C156_6 C156_7 C156_8 C157_1 C157_2 C157_3 C157_4 C157_5 C157_6 C157_7 C157_8 C159_1 C159_2 C159_3 C159_4 C159_5 C159_6 C159_7 C159_8 C161_1 C161_2 C161_3 C161_4 C161_5 C161_6 C161_7 C161_8 R52 R53 R55 R56 R68 R72 R73 R74 С1: library part C0603, "Capacitor 0603", Package=SMD0603, SMD Solder=2, TypeMount=SMD
C7 C8 C9 C10 C11 C12 C13 C14 C15 C16 C23 C23_1 C23_2 C23_3 C23_4 C23_5 C23_6 C23_7 C23_8 C23_9 C23_10 C23_11 C23_12 C23_13 C23_14 C23_15 C23_16 C85 C86 C91 C92 C94 C96 C110 C111 C114 C115 C148_1 C148_2 C148_3 C148_4 C148_5 C148_6 C148_7 C148_8 C148_9 C148_10 C148_11 C148_12 C148_13 C148_14 C148_15 C148_16 C149_1 C149_2 C149_3 C149_4 C149_5 C149_6 C149_7 C149_8 C149_9 C149_10 C149_11 C149_12 C149_13 C149_14 C149_15 C149_16 C158_1 C158_2 C158_3 C158_4 C158_5 C158_6 C158_7 C158_8 C160_1 C160_2 C160_3 C160_4 C160_5 C160_6 C160_7 C160_8 C162_1 C162_2 C162_3 C162_4 C162_5 C162_6 C162_7 C162_8: library part C0805, "Capacitor 0805", Package=SMD0805, SMD Solder=2
  C23 C23_1 C23_2 C23_3 C23_4 C23_5 C23_6 C23_7 C23_8 C23_9 C23_10 C23_11 C23_12 C23_13 C23_14 C23_15 C23_16 C85 C86 C91 C92 C94 C96 C110 C111 C114 C115 C148_1 C148_2 C148_3 C148_4 C148_5 C148_6 C148_7 C148_8 C148_9 C148_10 C148_11 C148_12 C148_13 C148_14 C148_15 C148_16 C149_1 C149_2 C149_3 C149_4 C149_5 C149_6 C149_7 C149_8 C149_9 C149_10 C149_11 C149_12 C149_13 C149_14 C149_15 C149_16 C158_1 C158_2 C158_3 C158_4 C158_5 C158_6 C158_7 C158_8 C160_1 C160_2 C160_3 C160_4 C160_5 C160_6 C160_7 C160_8 C162_1 C162_2 C162_3 C162_4 C162_5 C162_6 C162_7 C162_8: TypeMount=SMD
C46 C47 C78: library part Cap_10uF_POL_10%_TANA, "Polarized Capacitor,10uF,10V,10%,typeA,VISHAY", Manuf_1=VISHAY, Manuf_Part_1=293D106X9010A2TE3, ECCN_US/EU=n/a, Revision="July-2002: Re-released for DXP Platform."
CR2 U25: "USB protection", Mfr_Name=STMicroelectronics, RefDes=RefDes, Type=Type
  CR2: PartNumber=USBUF02W6, SMD Solders=6, THD Solders=0
D1 D2 D3 D4 D10: library part LED0603, "Чип светодиод 0603", Device=LED0603, Pkg=SMD0603, Price=10, SMD Solders=2, Solder Option=RM, Vendor=KB
D5: "2.0A SURFACE MOUNT SCHOTTKY BARRIER RECTIFIER", Package=PowerDI123, PartNumber=DFLS240, SMD Solders=2, THD Solders=0
D8_1 D8_2 D8_3 D8_4 D8_5 D8_6 D8_7 D8_8 D9_1 D9_2 D9_3 D9_4 D9_5 D9_6 D9_7 D9_8 D11_1 D11_2 D11_3 D11_4 D11_5 D11_6 D11_7 D11_8 D12_1 D12_2 D12_3 D12_4 D12_5 D12_6 D12_7 D12_8 D13_1 D13_2 D13_3 D13_4 D13_5 D13_6 D13_7 D13_8 D14_1 D14_2 D14_3 D14_4 D14_5 D14_6 D14_7 D14_8: "Diode Standard 200V 200mA Surface Mount SOT-23-3", Package="SOT-23-3 ON Semiconductor", Arrow_Electronics-Purchase-URL=https://snapeda.com/shop?store=Arrow+Electronics&id=2293125, Arrow_Europe-Purchase-URL=https://snapeda.com/shop?store=Arrow+Europe&id=2293125, Availability=Good, DigiKey-Purchase-URL=https://snapeda.com/shop?store=DigiKey&id=2293125, MF="ON Semiconductor", Mouser-Purchase-URL=https://snapeda.com/shop?store=Mouser&id=2293125, MP=MMBD1501A, Price=None, SnapEDA_Link=https://www.snapeda.com/parts/MMBD1501A/ON%20Semiconductor/view-part/2293125/?ref=snap
DD1: library part ADM3251, "Driver UART-RS232", Package=SOICW20, Device=ADM3251, SMD Solder=20, SolderOption=0, THD Solder=0, Unit_Price=1200, Unit Price=6, Vendor="Analog Devices"
DD2: "USB-UART driver", Package=DFN_12-0.45, Device=FT234XD, PartNumber=FT234XD, SMD Solders=7, THD Solders=0, Unit Price=2, Vendor=FTDI
J1 J3 J4 J5 J6 J7 J8 J9 J10 J11: PartNumber=DS1021-1x3, Device=PLS3, Price=1, SMD Solders=0, Solder Option=RM, THD Solders=3, TypeMount=THD, Vendor=Confly
J2: "Pluggable terminal block; socket; male; 3.5mm; angled 90A°; ways: 3", Availability=Unavailable, MF=Degson, MP=15EDGRC-3.5/3P, PartNumber=15EDGRC-3.5-3P, Price=None, SnapEDA_Link=https://www.snapeda.com/parts/15EDGRC-3.5/3P/Degson/view-part/550505/?ref=snap, THD Solders=3, TypeMount=SMD
J12 J13 J14 J15 J18 J26_1 J26_2 J26_3 J26_4 J26_5 J26_6 J26_7 J26_8 J27_1 J27_2 J27_3 J27_4 J27_5 J27_6 J27_7 J27_8: PartNumber=DS1021-1x2, Device=PLS2, Price=1, SMD Solders=0, Solder Option=RM, THD Solders=2, TypeMount=THD, Vendor=Confly
J16: library part "Connector 9 Female", "Connector 9 Female", PartNumber=5747844, SMD Solders=0, Solder Option=0, THD Solders=11
J17: library part AMPHENOL_RJHSE-5381, "1 Port, 8 Positions, CAT5 RJ45 Modular Connector With Yellow And Green LEDs"
J19: library part WF4, "Разъём угловой 15EDGRC-3.5-04P-14", Device=15EDGRC-3.5-04P-14, PartNumber=15EDGRC-3.5-04P-14, Price=20, SMD Solders=0, Solder Option=RM, THD Solders=4, Vendor="Degson Electronics"
J21_1 J21_2 J21_3 J21_4 J21_5 J21_6 J21_7 J21_8 J21_9 J21_10 J21_11 J21_12 J21_13 J21_14 J21_15 J21_16 J22_1 J22_2 J22_3 J22_4 J22_5 J22_6 J22_7 J22_8 J22_9 J22_10 J22_11 J22_12 J22_13 J22_14 J22_15 J22_16 J24_1 J24_2 J24_3 J24_4 J24_5 J24_6 J24_7 J24_8 J24_9 J24_10 J24_11 J24_12 J24_13 J24_14 J24_15 J24_16: library part PLS2, "PLS2", PartNumber=DS1021-1x2, Device=PLS2, Price=1, SMD Solders=0, Solder Option=RM, THD Solders=2, TypeMount=THD, Vendor=Confly
J25_1 J25_2 J25_3 J25_4 J25_5 J25_6 J25_7 J25_8: library part D_SUB_9M, "Вилка  DSUB 9 угловая", Device=DBR-9M, Name to order="DRB- 9MA (DBR-9M) (DS1037-9M)", Price=50, SMD Solders=0, Solder Option=RM, THD Solders=11, Vendor=Connfly
J28: library part USB_mini, "Вилка  PLS 6x2.54", PartNumber=1734035-1, Price=50, SMD Solders=6, SolderOption=Norm, THD Solders=0, Vendor="TE Connectivity"
J29: library part "Header 4", "Header, 4-Pin, Single row", PartNumber=DS1021-1*4SF11-B, Publisher="Altium Limited", Revision="17-Jul-2002: Re-released for DXP Platform.", SMD Solders=0, THD Solders=4
J30: "Вилка  PLS 6x2.54", PartNumber=1734035-1, Price=50, SMD Solders=6, SolderOption=Norm, THD Solders=0, Vendor="TE Connectivity"
K1: "General Purpose Relay SPST-NO _1 Form A_ 12VDC Coil Through Hole", Package="Custom Package Omron Electronics Inc.", Availability=Unavailable, MF="Omron Electronics", MP="G6RN-1 12DC", Price=None, SMD Solders=0, SnapEDA_Link=https://www.snapeda.com/parts/G6RN-1%2012DC/Omron%20Electronics%20Inc-EMC%20Div/view-part/490385/?ref=snap, THD Solders=5
L1 L2 L3 L4 L5 L7 L9 L10 L11 L12 L13 L14 L15 L16 L19_1 L19_2 L19_3 L19_4 L19_5 L19_6 L19_7 L19_8 L19_9 L19_10 L19_11 L19_12 L19_13 L19_14 L19_15 L19_16 L20_1 L20_2 L20_3 L20_4 L20_5 L20_6 L20_7 L20_8 L20_9 L20_10 L20_11 L20_12 L20_13 L20_14 L20_15 L20_16 L21_1 L21_2 L21_3 L21_4 L21_5 L21_6 L21_7 L21_8 L21_9 L21_10 L21_11 L21_12 L21_13 L21_14 L21_15 L21_16 L22 L24 L?: "SMD Ferrite bead 0805", Device=BLM21, Price=10, SMD Solders=2, Solder Option=RM, Vendor=Vishay
  L1 L2: Pkg=SMD0805
  L3 L4 L5 L7 L9 L10 L11 L12 L13 L14 L15 L16 L19_1 L19_2 L19_3 L19_4 L19_5 L19_6 L19_7 L19_8 L19_9 L19_10 L19_11 L19_12 L19_13 L19_14 L19_15 L19_16 L20_1 L20_2 L20_3 L20_4 L20_5 L20_6 L20_7 L20_8 L20_9 L20_10 L20_11 L20_12 L20_13 L20_14 L20_15 L20_16 L21_1 L21_2 L21_3 L21_4 L21_5 L21_6 L21_7 L21_8 L21_9 L21_10 L21_11 L21_12 L21_13 L21_14 L21_15 L21_16 L22 L24 L?: Pakage=SMD0805
L17 L18: "SMD Ferrite bead 0805", Package=SMD0805, Device=BLM21, Price=10, SMD Solders=2, Solder Option=RM, Vendor=Vishay
PoE1 TP1 TP2 TP3 TP4 TP5 TP6 TP7 TP8 TP9 TP10 TP11_1 TP11_2 TP11_3 TP11_4 TP11_5 TP11_6 TP11_7 TP11_8 TP11_9 TP11_10 TP11_11 TP11_12 TP11_13 TP11_14 TP11_15 TP11_16 TP12_1 TP12_2 TP12_3 TP12_4 TP12_5 TP12_6 TP12_7 TP12_8 TP13_1 TP13_2 TP13_3 TP13_4 TP13_5 TP13_6 TP13_7 TP13_8 TP14_1 TP14_2 TP14_3 TP14_4 TP14_5 TP14_6 TP14_7 TP14_8 TP16 TP17: library part OscTP, "Контрольная точка для подключения осциллографа короткой землёй", Price=0, SolderOption=PCB, Vendor=PCB
Q1: library part 817B, "Optocouple", Current=0, Package=DIP-4, PartNumber=LTV-817, Voltage=35V, Device=817B, Name to order=817B, Pkg=DIP4, Price=10, SMD Solders=0, Solder Option=RM, THD Solders=4, Vendor=UMW
Q2 Q3 Q4 Q5 Q10_1 Q10_2 Q10_3 Q10_4 Q10_5 Q10_6 Q10_7 Q10_8 Q10_9 Q10_10 Q10_11 Q10_12 Q10_13 Q10_14 Q10_15 Q10_16: "PMOS", Voltage=-30V, Pkg=SOT23, Price=10, SMD Solders=3, Solder Option=RM, THD Solders=0, Vendor=UMW
  Q2 Q3 Q4 Q5: Device=AO3407A, Name to order=AO3407A
  Q10_1 Q10_2 Q10_3 Q10_4 Q10_5 Q10_6 Q10_7 Q10_8 Q10_9 Q10_10 Q10_11 Q10_12 Q10_13 Q10_14 Q10_15 Q10_16: Device=AO3401A, Name to order=AO3401A
Q6 Q7 Q8 Q9 Q11_1 Q11_2 Q11_3 Q11_4 Q11_5 Q11_6 Q11_7 Q11_8 Q11_9 Q11_10 Q11_11 Q11_12 Q11_13 Q11_14 Q11_15 Q11_16: "NMOS", Voltage=30V, Pkg=SOT23, Price=10, SMD Solders=3, Solder Option=RM, Vendor=UMW
  Q6 Q7 Q8 Q9: Device=AO3404A, Name to order=AO3404A
  Q11_1 Q11_2 Q11_3 Q11_4 Q11_5 Q11_6 Q11_7 Q11_8 Q11_9 Q11_10 Q11_11 Q11_12 Q11_13 Q11_14 Q11_15 Q11_16: Device=AO3400A, Name to order=AO3400A
R1_1 R1_2 R1_3 R1_4 R1_5 R1_6 R1_7 R1_8 R1_9 R1_10 R1_11 R1_12 R1_13 R1_14 R1_15 R1_16 R2_1 R2_2 R2_3 R2_4 R2_5 R2_6 R2_7 R2_8 R2_9 R2_10 R2_11 R2_12 R2_13 R2_14 R2_15 R2_16: library part RQ73C2B10RBTD, "Precision Resistor, Thin Film, 1206, .4 W, 10 ohm, .1 %, ±10 ppm/°C", Package=None, Availability=Unavailable, MP=RQ73C2B10RBTD, PartNumber=RQ73C2B10RBTD, Price=None
R3_1 R3_2 R3_3 R3_4 R3_5 R3_6 R3_7 R3_8 R3_9 R3_10 R3_11 R3_12 R3_13 R3_14 R3_15 R3_16: library part RQ73C2A49K9BTD, "Precision Resistor, Thin Film, 0805, .2 W, 49.9K ohm, .1 %, ±10 ppm/°C", Package=None, Availability=Unavailable, MP=RQ73C2A49K9BTD, PartNumber=RQ73C2A49K9BTD, Price=None
R4 R5 R6 R7 R8 R9 R10 R11 R12 R13 R14 R15 R16 R17 R18 R19 R20 R21 R22 R23 R24 R25 R26 R27 R28 R29 R30 R31 R32 R33 R34 R35 R36 R37 R38 R39 R40 R41 R42 R43 R44 R45 R46 R47 R48 R49 R50 R51 R54 R57 R58 R59 R60 R61 R62 R63 R64 R65 R66 R67 R70 R71 R75 R76 R77 R78 R79 R80 R81 R82 R83 R84 R85 R86 R87 R88 R89 R90 R91 R92 R93 R94 R95 R96 R97 R98 R99 R100 R101 R102 R104 R105 R106 R107 R108 R109 R110 R111 R112 R113_1 R113_2 R113_3 R113_4 R113_5 R113_6 R113_7 R113_8 R113_9 R113_10 R113_11 R113_12 R113_13 R113_14 R113_15 R113_16 R114_1 R114_2 R114_3 R114_4 R114_5 R114_6 R114_7 R114_8 R114_9 R114_10 R114_11 R114_12 R114_13 R114_14 R114_15 R114_16 R115_1 R115_2 R115_3 R115_4 R115_5 R115_6 R115_7 R115_8 R115_9 R115_10 R115_11 R115_12 R115_13 R115_14 R115_15 R115_16 R116_1 R116_2 R116_3 R116_4 R116_5 R116_6 R116_7 R116_8 R116_9 R116_10 R116_11 R116_12 R116_13 R116_14 R116_15 R116_16 R117_1 R117_2 R117_3 R117_4 R117_5 R117_6 R117_7 R117_8 R117_9 R117_10 R117_11 R117_12 R117_13 R117_14 R117_15 R117_16 R118_1 R118_2 R118_3 R118_4 R118_5 R118_6 R118_7 R118_8 R119_1 R119_2 R119_3 R119_4 R119_5 R119_6 R119_7 R119_8 R120_1 R120_2 R120_3 R120_4 R120_5 R120_6 R120_7 R120_8 R121_1 R121_2 R121_3 R121_4 R121_5 R121_6 R121_7 R121_8 R122_1 R122_2 R122_3 R122_4 R122_5 R122_6 R122_7 R122_8 R123_1 R123_2 R123_3 R123_4 R123_5 R123_6 R123_7 R123_8 R124_1 R124_2 R124_3 R124_4 R124_5 R124_6 R124_7 R124_8 R125_1 R125_2 R125_3 R125_4 R125_5 R125_6 R125_7 R125_8 R126_1 R126_2 R126_3 R126_4 R126_5 R126_6 R126_7 R126_8 R127 R128_1 R128_2 R128_3 R128_4 R128_5 R128_6 R128_7 R128_8 R129_1 R129_2 R129_3 R129_4 R129_5 R129_6 R129_7 R129_8 R130_1 R130_2 R130_3 R130_4 R130_5 R130_6 R130_7 R130_8 R131_1 R131_2 R131_3 R131_4 R131_5 R131_6 R131_7 R131_8 R132_1 R132_2 R132_3 R132_4 R132_5 R132_6 R132_7 R132_8: library part R0603, "Resistor 0603", Package=SMD0603, SMD Solder=2
  R4 R5 R6 R7 R8 R9 R10 R11 R12 R13 R14 R15 R16 R17 R18 R19 R20 R21 R22 R23 R24 R25 R26 R27 R28 R29 R30 R31 R32 R33 R34 R35 R36 R37 R38 R39 R40 R41 R42 R43 R44 R45 R46 R47 R48 R49 R50 R51 R54 R57 R58 R59 R60 R61 R62 R63 R64 R65 R66 R67 R70 R71 R75 R76 R77 R78 R79 R80 R81 R82 R83 R84 R85 R86 R87 R88 R89 R90 R91 R92 R93 R94 R95 R96 R97 R98 R99 R100 R101 R102 R104 R105 R106 R107 R108 R113_1 R113_2 R113_3 R113_4 R113_5 R113_6 R113_7 R113_8 R113_9 R113_10 R113_11 R113_12 R113_13 R113_14 R113_15 R113_16 R114_1 R114_2 R114_3 R114_4 R114_5 R114_6 R114_7 R114_8 R114_9 R114_10 R114_11 R114_12 R114_13 R114_14 R114_15 R114_16 R115_1 R115_2 R115_3 R115_4 R115_5 R115_6 R115_7 R115_8 R115_9 R115_10 R115_11 R115_12 R115_13 R115_14 R115_15 R115_16 R116_1 R116_2 R116_3 R116_4 R116_5 R116_6 R116_7 R116_8 R116_9 R116_10 R116_11 R116_12 R116_13 R116_14 R116_15 R116_16 R117_1 R117_2 R117_3 R117_4 R117_5 R117_6 R117_7 R117_8 R117_9 R117_10 R117_11 R117_12 R117_13 R117_14 R117_15 R117_16 R118_1 R118_2 R118_3 R118_4 R118_5 R118_6 R118_7 R118_8 R119_1 R119_2 R119_3 R119_4 R119_5 R119_6 R119_7 R119_8 R120_1 R120_2 R120_3 R120_4 R120_5 R120_6 R120_7 R120_8 R121_1 R121_2 R121_3 R121_4 R121_5 R121_6 R121_7 R121_8 R122_1 R122_2 R122_3 R122_4 R122_5 R122_6 R122_7 R122_8 R123_1 R123_2 R123_3 R123_4 R123_5 R123_6 R123_7 R123_8 R124_1 R124_2 R124_3 R124_4 R124_5 R124_6 R124_7 R124_8 R125_1 R125_2 R125_3 R125_4 R125_5 R125_6 R125_7 R125_8 R126_1 R126_2 R126_3 R126_4 R126_5 R126_6 R126_7 R126_8 R127 R128_1 R128_2 R128_3 R128_4 R128_5 R128_6 R128_7 R128_8 R129_1 R129_2 R129_3 R129_4 R129_5 R129_6 R129_7 R129_8 R130_1 R130_2 R130_3 R130_4 R130_5 R130_6 R130_7 R130_8 R131_1 R131_2 R131_3 R131_4 R131_5 R131_6 R131_7 R131_8 R132_1 R132_2 R132_3 R132_4 R132_5 R132_6 R132_7 R132_8: TypeMount=SMD
R69: library part Res_1K5_1%_0402, "Resistor,1K5,0402,1%,YAGEO", Manuf_1=YAGEO, Manuf_Part_1=RC0402FR-071K5L, Distrib=FARNELL, ECCN_US/EU=n/a, Order=RC0402FR-071K5L
R103: library part LT5400, "4 прецизионных резистора", Tolerance=0..025%, Device=LT5400, Name to order=LT5400BMPMS8E-6#PBF, Pkg="MSOP 9-0.65", Price=2, Pwr=40C/W, SMD Solders=8, Solder Option=i, TC=200ppb/C, THD Solders=0, Vendor="Analog Devices"
R133_1 R133_2 R133_3 R133_4 R133_5 R133_6 R133_7 R133_8 R134_1 R134_2 R134_3 R134_4 R134_5 R134_6 R134_7 R134_8: library part RQ73C2A1K0BTD, "Precision Resistor, Thin Film, 0805, .2 W, 49.9K ohm, .1 %, ±10 ppm/°C", Package=None, Availability=Unavailable, MP=RQ73C2A1K0BTD, PartNumber=RQ73C2A1K0BTD, Price=None
T1: "Isolation and Data Interface _Encapsulated_ Pulse Transformer 1CT:1CT Surface Mount", Package="Pulse Electronics", Availability=Unavailable, MF="Pulse Electronics", MP=H5007NL-T, Price=None, SnapEDA_Link=https://www.snapeda.com/parts/H5007NL-T/Pulse%20Electronics%20Network/view-part/2770413/?ref=snap
T2: library part BC846, "Bipolar transistor"
U1: "Analog to Digital Converters", Mfr_Name="Analog Devices Inc", Package="64-Lead LQFP", PartNumber=AD7768BSTZ, RefDes=RefDes, SMD Solders=64, THD Solders=0, Type="Data Acquisition", TypeMount=SMD
U2: "4 лог. элемента 2ИЛИ-НЕ", Voltage="2.. 6V", Device=74HC02D, Name to order=74HC02D, Pkg=SOIC14, Price=50, SMD Solders=14, Solder Option=RM, Vendor=NXP
U3: "Isolateted DC DC 5V->5V or 3V3 60mA", Current=200, Device=ADUM5028, Name to order=ADuM5028-5BRIZ, Pkg=SOIC8, Price=2500, SMD Solders=8, Solder Option=RM, Vendor="Analog Devoces"
U4: "No Description Available", Mfr_Name=STMicroelectronics, Package=LQFP208, PartNumber=STM32F756BGT6, RefDes=RefDes, SMD Solders=208, Type=Type, TypeMount=SMD
U5 U6 U7 U8: library part TPS3808, "Supervisory Circuit. Low-Quiescent-Current, Programmable-Delay", Current=6uA, Package=SOT23-6, PartNumber=TPS3808G01DBV, thVoltage=400mV, Device=TPS3808, Name to order=TPS3808G01DBV, Price=200, SMD Solders=6, Solder Option=RM, THD Solders=0, TypeMount=SMD, Vendor="Texas Instruments"
U10: "LAN8742A-CZ-TR - Small Footprint RMII 10/100 Ethernet, Transceiver with HP Auto-MDIX and flexPWR Technology SQFN-24", Manuf_1=MICROCHIP, Distrib=MICROCHIP, Manuf_Part_1=LAN8742A-CZ-TR, Order=LAN8742A-CZ-TR
U11 U15: library part LMZ12003, "Switching Voltage Regulators 3A Pwr Mod", Package=TO-PMOD-7, PartNumber=LMZ12003EXTTZ, thVoltage=-, Device=LMZ12003, Name to order=LMZ12003EXT, PkgCode=EXT, Price=11000, SMD Solders=8, Solder Option=EXT, THD Solders=0, Vendor="Texas Instruments"
U12: library part DCP021212U, "Miniature, 2W Isolated Unregulated DC/DC Converters", Package="PDIP-7 Texas Instruments", Check_prices=https://www.snapeda.com/parts/DCP021212P/Texas+Instruments/view-part/?ref=eda, MF="Texas Instruments", MP=DCP021212U, PartNumber=DCP021212U, SnapEDA_Link=https://www.snapeda.com/parts/DCP021212P/Texas+Instruments/view-part/?ref=snap
U13 U14 U16: library part REG104_5V, "Positive LDO Linear stabilizer 5Vin to 3V3Digital", Package=SOT223-6, PartNumber=REG104GA-3.3, Device=REG104GA-3.3, SMD Solders=6, SolderOption=0, Step=2, THD Solders=0, Unit Price=6, Vendor="Texas Instruments"
U17: library part ADP7118ACPZN-R7, "No Description Available", Mfr_Name="Analog Devices Inc", PartNumber=ADP7118ACPZN-R7, RefDes=RefDes, SMD Solders=7, THD Solders=0, Type="Power Management"
U18: library part LTC6655LNCHMS8-4.096#TRPBF, "0.25ppm Noise, Low Drift Precision References", Package="MSOP-8 Analog Devices", Check_prices=https://www.snapeda.com/parts/LTC6655LNCHMS8-4.096%23TRPBF/Analog+Devices/view-part/?ref=eda, MF="Analog Devices", MP=LTC6655LNCHMS8-4.096#TRPBF, PartNumber=LTC6655LNCHMS8-4.096#TRPBF, SnapEDA_Link=https://www.snapeda.com/parts/LTC6655LNCHMS8-4.096%23TRPBF/Analog+Devices/view-part/?ref=snap
U19: library part ADP7182, "Negative LDO Linear stabilizer", PartNumber=ADP7182AUJZ-R7, Device=ADP7182, Name to order=ADP7182AUJZ-R7, Pkg=SOT23-5, Price=100, SMD Solders=5, Solder Option=RM, Vendor="Analog Devoces", Vref=1V22
U20: library part REG104_5V, "Positive LDO Linear stabilizer 5Vin to 3V3Digital", Package=SOT223-6, PartNumber=REG104GA-5, Device=REG104GA-5, SMD Solders=6, SolderOption=0, Step=2, THD Solders=0, Unit Price=6, Vendor="Texas Instruments"
U21: library part IS42S32400F/IS45S32400F, "4M x 32 / 128Mb SYNCHRONOUS DRAM"
U22_1 U22_2 U22_3 U22_4 U22_5 U22_6 U22_7 U22_8 U22_9 U22_10 U22_11 U22_12 U22_13 U22_14 U22_15 U22_16: library part LT3092, "Reference, 5 V", Current=10uA, Package=SOT-223, PartNumber=LT3092EST, Tolerance=1%, Voltage="max 40V", Device=LT3092EST, Name to order="LT3092EST, LT3092IST", Pkg=SOT-223, Price=1700, SMD Solders=4, Solder Option=RM, TC=10ppm/C, Vendor="Analog Devices Inc"
U23_1 U23_2 U23_3 U23_4 U23_5 U23_6 U23_7 U23_8: "MUX", Mfr_Name="Analog Devices Inc", Package=TSSOP-16, PartNumber=ADG1609BRUZ, RefDes=RefDes, Type=Type
U24_1 U24_2 U24_3 U24_4 U24_5 U24_6 U24_7 U24_8: "No Description Available", Mfr_Name="Analog Devices Inc", Digi-Key_Part_Number_1=505-ADA4254ACPZ-R7TR-ND, PartNumber=ADA4254ARUZ, RefDes=RefDes, Type=Type
U26: "Isolated PoE Module DC DC Converter 1 Output 12V - - - 2.125A 37V - 57V Input", Package="SMD-7 Murata Power Solutions Inc.", Availability="In Stock", Check_prices=https://www.snapeda.com/parts/MYBSP0122BABFT/Murata/view-part/?ref=eda, MF="Murata Power Solutions", MP=MYBSP0122BABFT, Price=None, Purchase-URL=https://pricing.snapeda.com/search/part/MYBSP0122BABFT/?ref=eda, SnapEDA_Link=https://www.snapeda.com/parts/MYBSP0122BABFT/Murata/view-part/?ref=snap
X2: library part XTAL_5032, "Crystal Oscillator", LatestRevisionDate=17-Jul-2002, LatestRevisionNote="Re-released for DXP Platform.", PackageReference=R38, Published=8-Jun-2000, Publisher="Altium Limited"
Y1 Y2: "8 MHz XO (Standard) HCMOS, TTL Oscillator 3.3V Enable/Disable 4-SMD, No Lead", Package="NON STANDARD-4 CTS", Check_prices=https://www.snapeda.com/parts/CB3LV-6C-8M000000/CTS-Frequency+Controls/view-part/?ref=eda, MF="CTS-Frequency Controls", MP=CB3LV-6C-8M000000, SnapEDA_Link=https://www.snapeda.com/parts/CB3LV-6C-8M000000/CTS-Frequency+Controls/view-part/?ref=snap
  Y2: PartNumber=CB3LV-6C-8M000000, SMD Solders=4

## Via types
v1: diameter 0.7, hole 0.3, Top Layer to Bottom Layer, tented both sides, 659 vias
v2: diameter 1, hole 0.5, Top Layer to Bottom Layer, tented both sides, 12 vias
v3: diameter 0.66, hole 0.33, Top Layer to Bottom Layer, 2 vias

## Nets (pads, with @x,y where several pads share a name; then routed paths per layer and width w, separated by ;. In a path a pad name is that pad's centre, name@x,y a point inside that pad or via, vN(x,y) a via of type N, cw(c..) or ccw(c..) an arc to the next point about the centre after c; other vN are vias at no path point)
"2V5 VOCM AD7768": C154_1.2 C154_2.2 C154_3.2 C154_4.2 C154_5.2 C154_6.2 C154_7.2 C154_8.2 U1.59 U24_1.2 U24_2.2 U24_3.2 U24_4.2 U24_5.2 U24_6.2 U24_7.2 U24_8.2 | length 451
  Top Layer w0.254: v1(198.7,113.044) 198.728,113.072 U1.59@198.728,114.404
  Top Layer w0.3: U24_1.2@34.63,38.725 36.775,38.725 v1(36.8,38.7) ; U24_2.2@82.63,38.725 84.775,38.725 v1(84.8,38.7) ; U24_3.2@130.63,38.725 132.775,38.725 v1(132.8,38.7) ; U24_4.2@178.63,38.725 180.775,38.725 v1(180.8,38.7) ; U24_5.2@226.63,38.725 228.775,38.725 v1(228.8,38.7) ; U24_6.2@274.63,38.725 276.775,38.725 v1(276.8,38.7) ; U24_7.2@322.63,38.725 324.775,38.725 v1(324.8,38.7) ; U24_8.2@370.63,38.725 372.775,38.725 v1(372.8,38.7)
  Signal Layer 1 w0.5: v1(36.8,38.7) v1(84.8,38.7) v1(132.8,38.7) v1(180.8,38.7) v1(228.8,38.7) v1(276.8,38.7) v1(324.8,38.7) v1(372.8,38.7) ; v1(182.4,88.6) 186.9,93.1 186.9,101.7 198.244,113.044 v1(198.7,113.044)
  Signal Layer 2 w0.5: v1(180.8,38.7) 183.2,41.1 183.2,53 181.25,54.95 181.25,77.838 182.4,78.988 v1(182.4,88.6)
  Bottom Layer w0.5: C154_1.2@35.5,39.2 36.4,39.2 36.8,38.8 v1(36.8,38.7) ; C154_2.2@83.5,39.2 84.4,39.2 84.8,38.8 v1(84.8,38.7) ; C154_3.2@131.5,39.2 132.4,39.2 132.8,38.8 v1(132.8,38.7) ; C154_4.2@179.5,39.2 180.4,39.2 180.8,38.8 v1(180.8,38.7) ; C154_5.2@227.5,39.2 228.4,39.2 228.8,38.8 v1(228.8,38.7) ; C154_6.2@275.5,39.2 276.4,39.2 276.8,38.8 v1(276.8,38.7) ; C154_7.2@323.5,39.2 324.4,39.2 324.8,38.8 v1(324.8,38.7) ; C154_8.2@371.5,39.2 372.4,39.2 372.8,38.8 v1(372.8,38.7)
"3V3 Digital AD7768, PGA": C5.2 C11.2 C21.1 C51.1 C147_1.1 C147_2.1 C147_3.1 C147_4.1 C147_5.1 C147_6.1 C147_7.1 C147_8.1 L5.2 L9.2 R7.2 R8.2 R10.2 R18.2 R23.2 R32.2 R45.2 R126_1.2 R126_2.2 R126_3.2 R126_4.2 R126_5.2 R126_6.2 R126_7.2 R126_8.2 U1.35 U24_1.14 U24_2.14 U24_3.14 U24_4.14 U24_5.14 U24_6.14 U24_7.14 U24_8.14 Y1.4 Y2.4 | length 828.6
  Top Layer w0.254: U1.35@205.858,105.774 v1(208.125,105.774) ; v1@208.125,105.595 v1(208.125,105.774) ; C5.2@209.225,105.774 v1(208.125,105.774)
  Top Layer w0.3: U24_1.14@40.37,32.875 43.825,32.875 46,30.7 v1(46,28.7) 47.1,28.7 C147_1.1@47.2,28.8 ; U24_2.14@88.37,32.875 91.825,32.875 94,30.7 v1(94,28.7) 95.1,28.7 C147_2.1@95.2,28.8 ; U24_3.14@136.37,32.875 139.825,32.875 142,30.7 v1(142,28.7) 143.1,28.7 C147_3.1@143.2,28.8 ; U24_4.14@184.37,32.875 187.825,32.875 190,30.7 v1(190,28.7) 191.1,28.7 C147_4.1@191.2,28.8 ; U24_5.14@232.37,32.875 235.825,32.875 238,30.7 v1(238,28.7) 239.1,28.7 C147_5.1@239.2,28.8 ; U24_6.14@280.37,32.875 283.825,32.875 286,30.7 v1(286,28.7) 287.1,28.7 C147_6.1@287.2,28.8 ; U24_7.14@328.37,32.875 331.825,32.875 334,30.7 v1(334,28.7) 335.1,28.7 C147_7.1@335.2,28.8 ; U24_8.14@376.37,32.875 379.825,32.875 382,30.7 v1(382,28.7) 383.1,28.7 C147_8.1@383.2,28.8
  Top Layer w0.5: R126_1.2@48.8,42.6 48.8,43.6 v1(49.1,43.9) ; R126_2.2@96.8,42.6 96.8,43.6 v1(97.1,43.9) ; R126_3.2@144.8,42.6 144.8,43.6 v1(145.1,43.9) ; R8.2@191.8,103.2 v1(193.3,103.2) ; R126_4.2@192.8,42.6 192.8,43.6 v1(193.1,43.9) ; R126_5.2@240.8,42.6 240.8,43.6 v1(241.1,43.9) ; R126_6.2@288.8,42.6 288.8,43.6 v1(289.1,43.9) ; R126_7.2@336.8,42.6 336.8,43.6 v1(337.1,43.9) ; R126_8.2@384.8,42.6 384.8,43.6 v1(385.1,43.9)
  Top Layer w0.508: R32.2@124.05,188.675 124.075,188.65 v1(125.275,188.65) ; v1@125.3,188.675 126.175,189.55 Y2.4@127.235,189.55 ; C21.1@210.1,91.2 210.033,91.267 Y1.4@210.033,93.946 212.787,96.7 217.941,96.7 217.941,100.859 v1@215.15,103.65 ; v1@215.025,103.775 R10.2@215.025,105.125